# Altium PCB BDR110414.PcbDoc
Units mm, origin at the board's own origin, x right, y up, seen from the top; angles counter-clockwise.
Board outline 101.85 x 53.59 mm, 2 copper layers (Top Layer, Bottom Layer), stack 1.671 mm thick; 58 components, 107 nets, 243 pads, 54 vias.
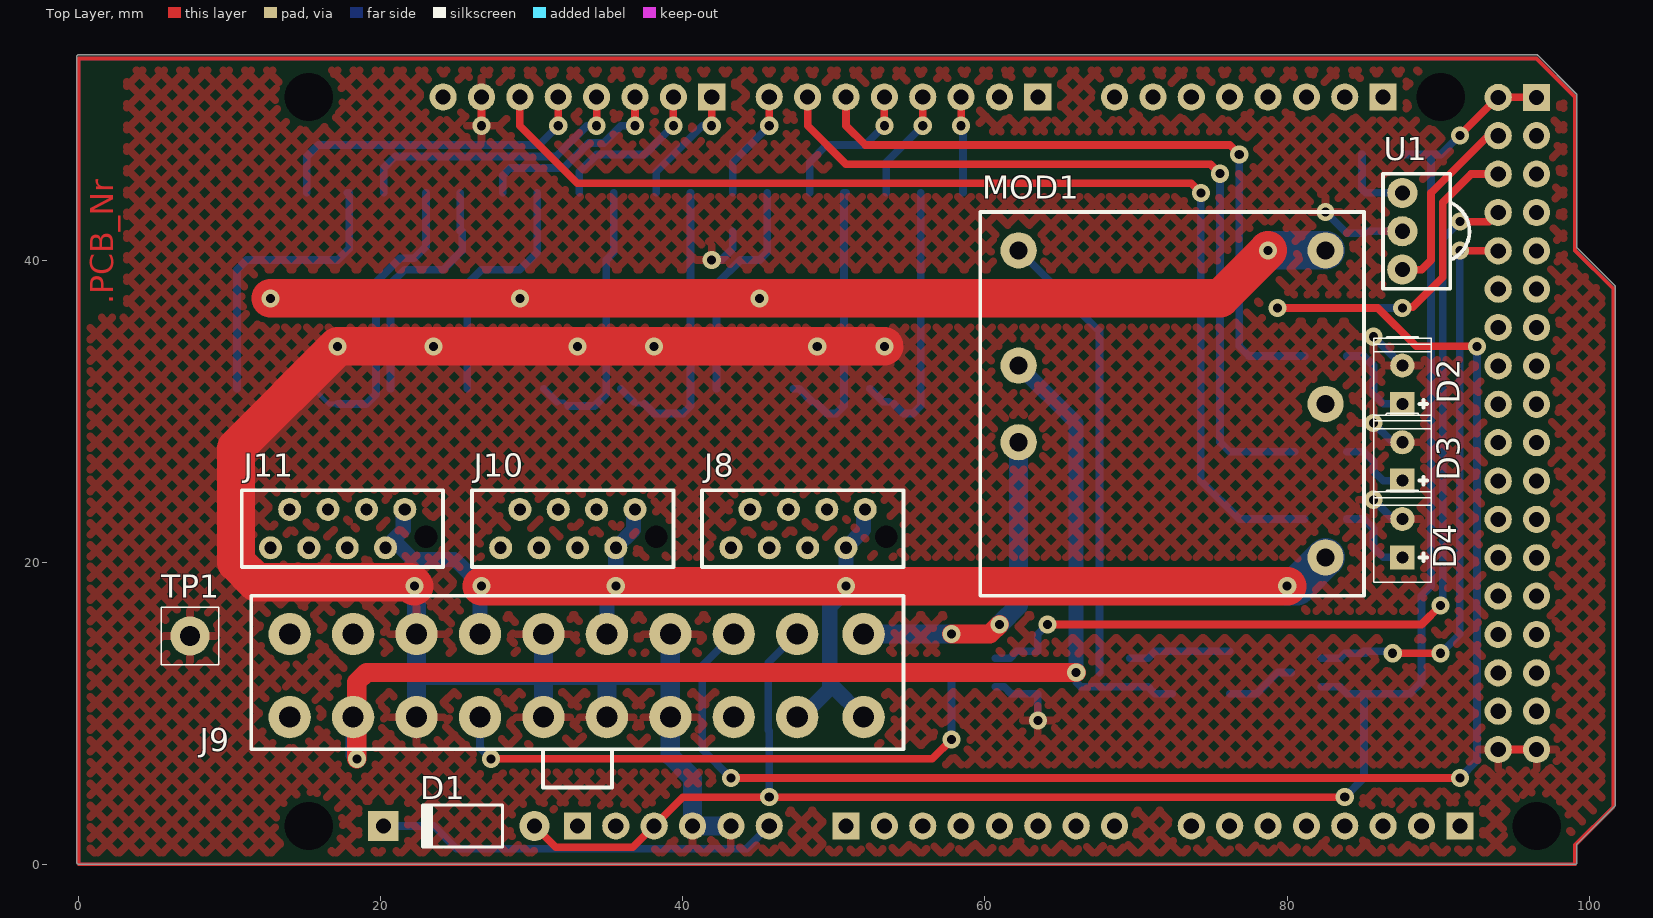
[diagram p0: Top Layer view]
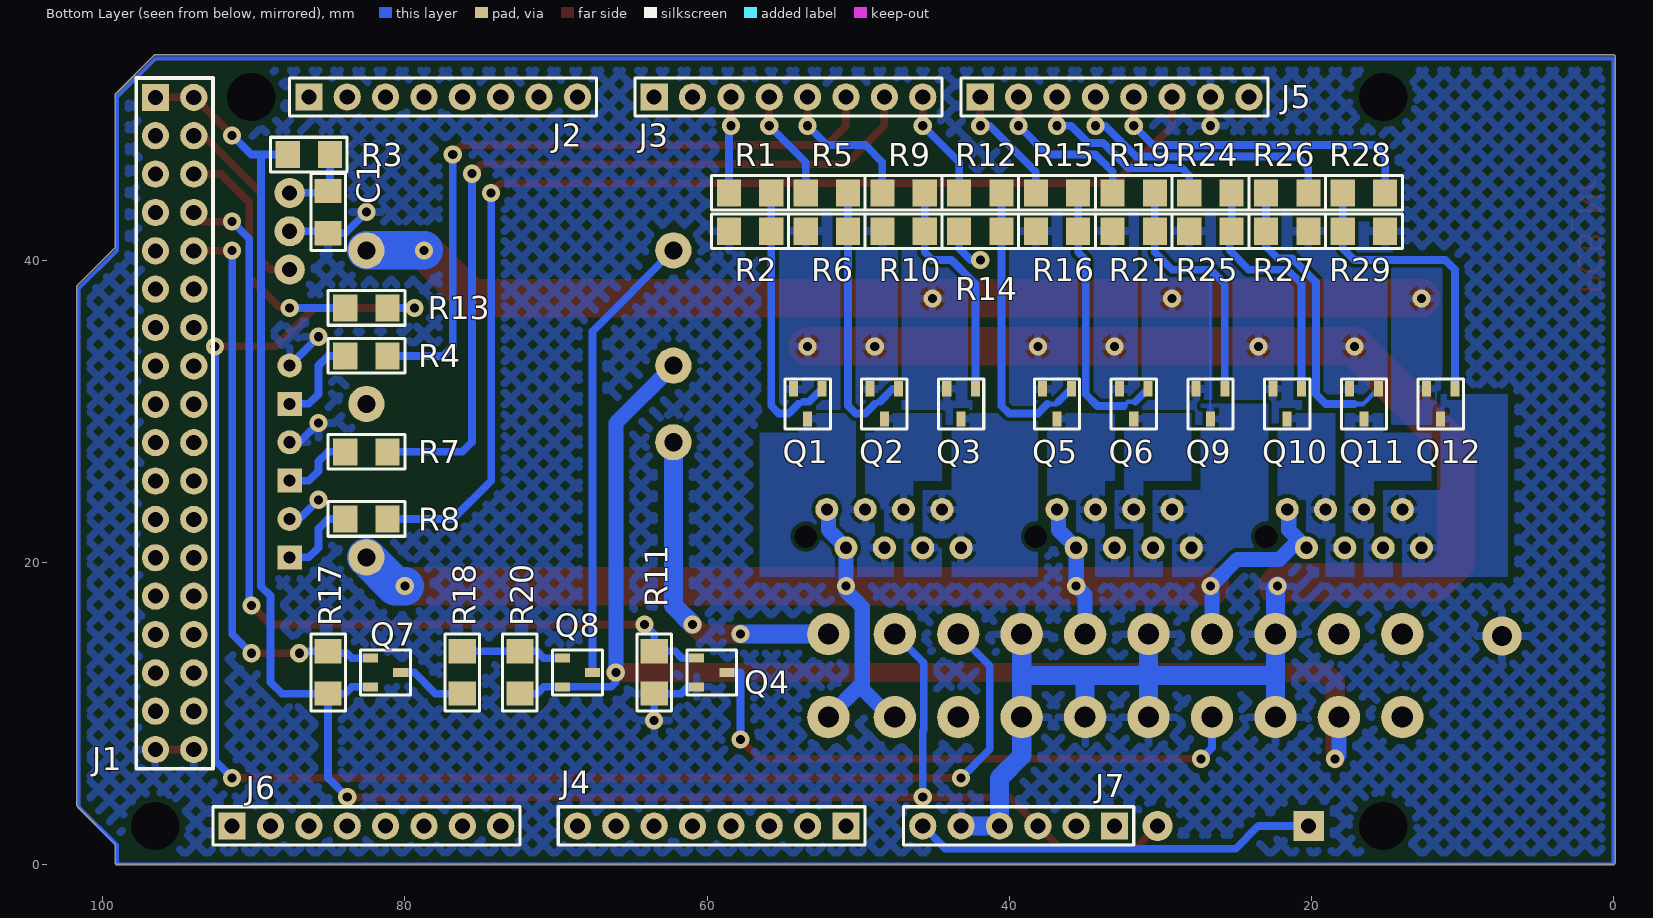
[diagram p1: Bottom Layer view, seen from below]
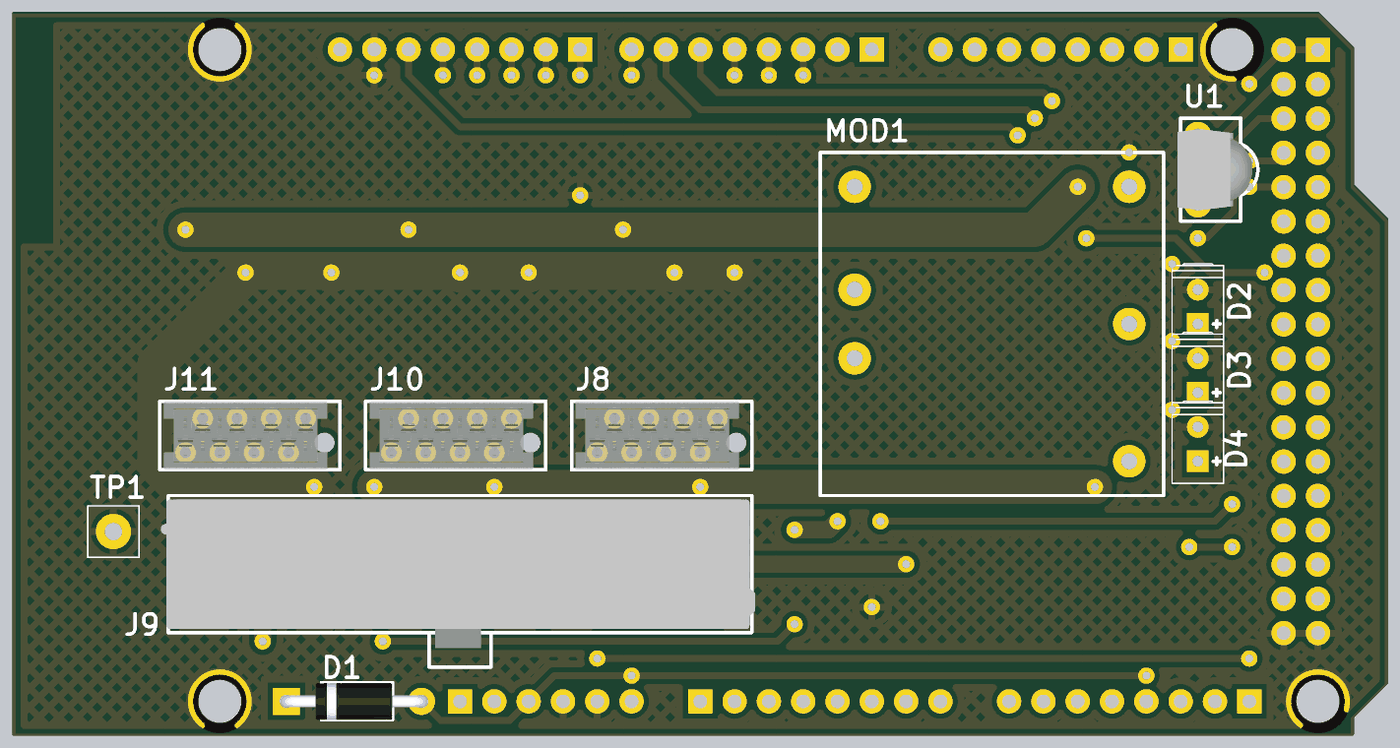
[diagram p2: 3D render of the assembled board from above, using the file's embedded part models]
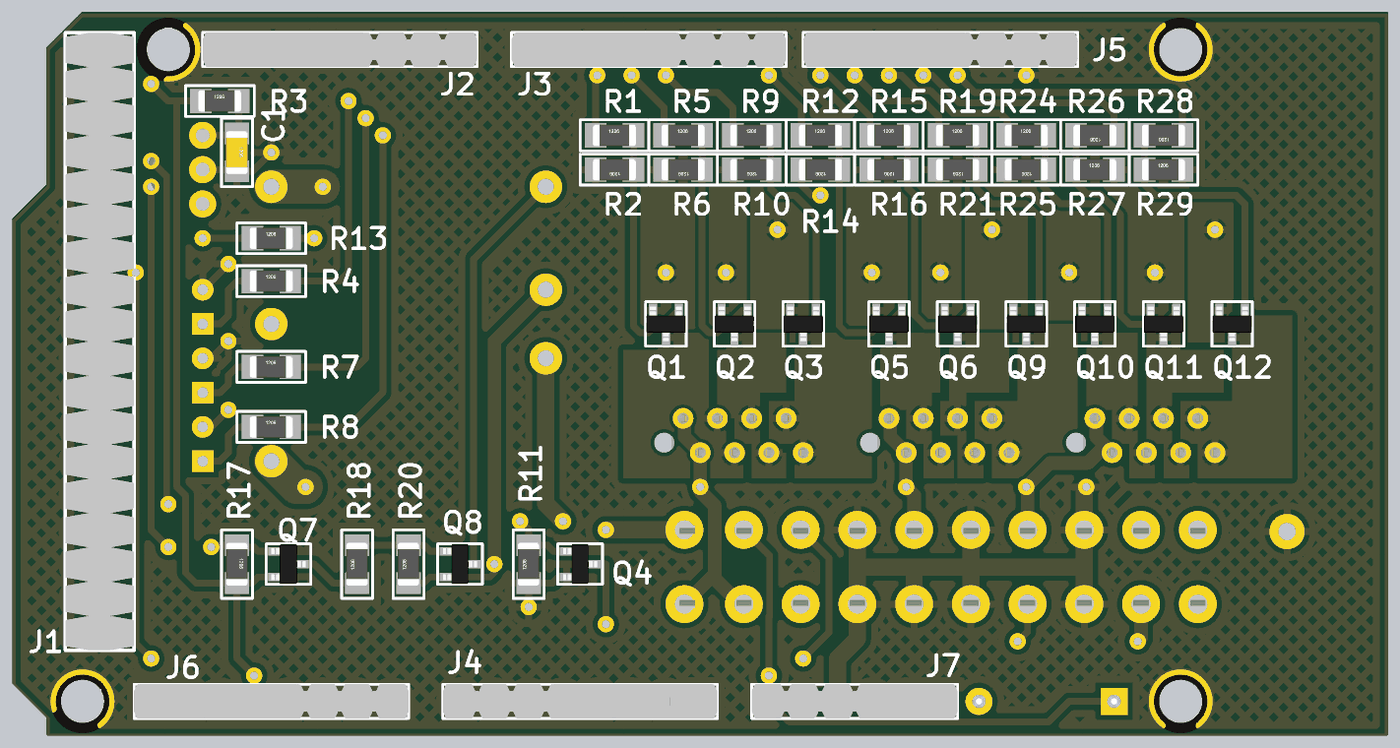
[diagram p3: 3D render of the assembled board from below, using the file's embedded part models]

## Layer stack, top to bottom
Top Layer: signal copper 0.0356
Dielectric: core 1.6, FR-4, Dk 4.8
Bottom Layer: signal copper 0.0356

## Board outline
0,0 99.06,0 ccw(c99.06,0.127) 99.187,0.127 99.187,1.345 101.69,3.847 ccw(c101.6,3.937) 101.727,3.937 101.727,38.227 ccw(c101.6,38.227) 101.69,38.318 101.69,38.317 99.187,40.82 99.187,50.927 cw(c99.124,50.927) 99.187,50.927 ccw(c99.06,50.927) 99.187,50.927 ccw(c99.06,50.927) 99.15,51.018 99.15,51.017 96.611,53.557 ccw(c96.565,53.512) 96.61,53.557 ccw(c96.52,53.467) 96.519,53.595 96.52,53.595 cw(c96.52,53.467) 96.611,53.557 96.61,53.557 96.52,53.595 0,53.595 ccw(c0,53.467) -0.127,53.467 -0.127,0.127 ccw(c0,0.127)

## Design rules (kind name [scope] priority, off if disabled: settings)
Clearance Clearance_Planes [(InNamedPolygon('TOP_GND') OR InNamedPolygon('BOT_GND'))] p1: gap=0.381
Clearance Clearance_General [All] p2: gap=0.254
HoleSize [All] p1: absolutevalues=TRUE maxlimit=3.2 minlimit=0.6 maxpercent=80.000 minpercent=20.000
MinimumAnnularRing [All] p1: minimumring=0.3
MinimumSolderMaskSliver [All] p1 off: minsoldermaskwidth=0.254
PlaneConnect [All] p1: planeconnectstyle=Relief reliefexpansion=0.508 reliefentries=4 reliefconductorwidth=0.508 reliefairgap=0.254
PolygonConnect [All] p1: connectstyle=Relief reliefconductorwidth=0.508 reliefentries=4 polygonreliefangle="90 Angle"
RoutingVias [All] p1: holewidth=0.6 width=1.27 viastyle="Through Hole" minholewidth=0.6 minwidth=1.27 maxholewidth=3.2 maxwidth=6.4
SilkToSilkClearance [All] p1 off: silktosilkclearance=0.254
SilkscreenOverComponentPads [All] p1 off: minsilkscreentomaskgap=0.254
SolderMaskExpansion [All] p1: expansion=0
Width [All] p1: maxlimit=5 minlimit=0.254 preferedwidth=0.508
23 further rules are at their usual default settings.

## Components (designator, comment, footprint, x,y, rotation, side; value= is the part's Value field where it differs from the comment)
C1 "YCAM4U7" C_1206 85.09,43.18 r270 bottom
D1 "DIO1N4007" DO-41 25.4,2.54 r180 top
D2 "OVL3328" D_LED3mm_straight 87.63,30.48 r270 top
D3 "OVL3324" D_LED3mm_straight 87.63,25.4 r270 top
D4 "OVL3323" D_LED3mm_straight 87.63,20.32 r270 top
J1 "CNHDR036M3-2_TBD" J_HDR2X18 96.52,50.775 r180 bottom locked
J2 "CNHDR036M3-1/8" J_HDR1X8 86.36,50.8 r180 bottom
J3 "CNHDR036M3-1/8" J_HDR1X8 63.5,50.8 r180 bottom
J4 "CNHDR036M3-1/8" J_HDR1X8 50.8,2.54 r0 bottom
J5 "CNHDR036M3-1/8" J_HDR1X8 41.91,50.8 r180 bottom
J6 "CNHDR036M3-1/8" J_HDR1X8 91.44,2.54 r180 bottom
J7 "CNHDR036M3-1/6" J_HDR1X6 33.02,2.54 r0 bottom locked
J8 "CNFLC08M_TBD" J_215079-8 52.07,23.495 r0 top
J9 "39-28-1203" J_MiniFit_Jr_20P 13.97,15.24 r0 top
J10 "CNFLC08M_TBD" J_215079-8 36.83,23.495 r0 top
J11 "CNFLC08M_TBD" J_215079-8 21.59,23.495 r0 top
MOD1 "YDCDC15W-3V3-SH" MOD_DCDC_15W_TH 62.23,27.94 r0 top
Q1 "ZXMN2F30FH" SOT23 53.34,30.48 r270 bottom
Q2 "ZXMN2F30FH" SOT23 48.26,30.48 r270 bottom
Q3 "ZXMN2F30FH" SOT23 43.18,30.48 r270 bottom
Q4 "2N7002" SOT23 59.69,12.7 r180 bottom
Q5 "ZXMN2F30FH" SOT23 36.83,30.48 r270 bottom
Q6 "ZXMN2F30FH" SOT23 31.75,30.48 r270 bottom
Q7 "BSS84" SOT23 81.28,12.7 r180 bottom
Q8 "2N7002" SOT23 68.58,12.7 r180 bottom
Q9 "ZXMN2F30FH" SOT23 26.67,30.48 r270 bottom
Q10 "ZXMN2F30FH" SOT23 21.59,30.48 r270 bottom
Q11 "ZXMN2F30FH" SOT23 16.51,30.48 r270 bottom
Q12 "ZXMN2F30FH" SOT23 11.43,30.48 r270 bottom
R1 "YRES120E_TBD" R_1206 57.15,44.45 r180 bottom
R2 "YRES10K" R_1206 57.15,41.91 r0 bottom
R3 "YRES120E_TBD" R_1206 86.36,46.99 r180 bottom
R4 "YRES270E_TBD" R_1206 82.55,33.655 r180 bottom
R5 "YRES120E_TBD" R_1206 52.07,44.45 r180 bottom
R6 "YRES10K" R_1206 52.07,41.91 r0 bottom
R7 "YRES270E_TBD" R_1206 82.55,27.305 r180 bottom
R8 "YRES270E_TBD" R_1206 82.55,22.86 r180 bottom
R9 "YRES120E_TBD" R_1206 46.99,44.45 r180 bottom
R10 "YRES10K" R_1206 46.99,41.91 r0 bottom
R11 "YRES10K" R_1206 63.5,12.7 r90 bottom
R12 "YRES120E_TBD" R_1206 41.91,44.45 r180 bottom
R13 "YRES270E_TBD" R_1206 82.55,36.83 r180 bottom
R14 "YRES10K" R_1206 41.91,41.91 r0 bottom
R15 "YRES120E_TBD" R_1206 36.83,44.45 r180 bottom
R16 "YRES10K" R_1206 36.83,41.91 r0 bottom
R17 "YRES10K" R_1206 85.09,12.7 r270 bottom
R18 "YRES10K" R_1206 76.2,12.7 r90 bottom
R19 "YRES120E_TBD" R_1206 31.75,44.45 r180 bottom
R20 "YRES10K" R_1206 72.39,12.7 r90 bottom
R21 "YRES10K" R_1206 31.75,41.91 r0 bottom
R24 "YRES120E_TBD" R_1206 26.67,44.45 r180 bottom
R25 "YRES10K" R_1206 26.67,41.91 r0 bottom
R26 "YRES120E_TBD" R_1206 21.59,44.45 r0 bottom
R27 "YRES10K" R_1206 21.59,41.91 r180 bottom
R28 "YRES120E_TBD" R_1206 16.51,44.45 r0 bottom
R29 "YRES10K" R_1206 16.51,41.91 r180 bottom
TP1 "CN001M1" TP_TH_1.3mm 7.366,15.113 r0 top
U1 "TSOP34838" TSOP34XXX 87.63,39.37 r90 top

## Footprints (in the part's own frame and the unit in brackets; to place one, negate y for a bottom-side part, rotate by r counter-clockwise, add the part's x,y. Pads: shape width x height; smd on the part's side, far side on the other; paste and mask are expansions set on the pad)
C_1206 [mm] "Chip Capacitor; Body 3.2 x 1.6 mm (LxW typ)"
  rect 1.6x1.8 smd: 1(-1.4,0) 2(1.4,0)
  silkscreen extent -2.54,-1.14 2.54,1.14, body extent -1.6,-0.8 1.6,0.8, height 1
D_LED3mm_straight [mm]
  rect 1.6x1.6 hole 0.8: 1(0,0)
  round 1.6 hole 0.8: 2(-2.54,0)
  silkscreen extent -4.46,-1.91 1.64,1.91
DO-41 [mm] "Diode, Axial; Body 5.2 x 2.7 mm (LxDia. max), Lead Dia. 0.86 mm (max)"
  round 2 hole 1: 1(-4.77,0)
  rect 2x2 hole 1: 2(5.23,0)
  silkscreen extent -2.65,-1.4 2.75,1.4, body extent -5.2,-1.36 5.66,1.36, height 2.72
J_215079-8 [mil] "MicroMatch 8p through hole vertical"
  round 0 hole 59.06 unplated mask+29.53: 0(55.12,-70.87)
  round 60 hole 31.5: 1(0,0) 2(-50,-100) 3(-100,0) 4(-150,-100) 5(-200,0) 6(-250,-100) 7(-300,0) 8(-350,-100)
  silkscreen extent -425,-150 100,50, body extent -413,-148 63,48, height 157
J_HDR1X6 [mm] "Connector; Header; 6 Position"
  rect 1.8x1.8 hole 1: 1(0,0)
  round 1.8 hole 1: 2(2.54,0) 3(5.08,0) 4(7.62,0) 5(10.16,0) 6(12.7,0)
  silkscreen extent -1.27,-1.27 13.97,1.27, body extent -1.27,-1.27 13.97,1.27, height 9.26
J_HDR1X8 [mm] "Connector; Header; 8 Position"
  rect 1.8x1.8 hole 1: 1(0,0)
  round 1.8 hole 1: 2(2.54,0) 3(5.08,0) 4(7.62,0) 5(10.16,0) 6(12.7,0) 7(15.24,0) 8(17.78,0)
  silkscreen extent -1.27,-1.27 19.05,1.27, body extent -1.27,-1.27 19.05,1.27, height 9.26
J_HDR2X18 [mm] "Header, 2X18, unshrouded, Molex 90131-0938"
  rect 1.8x1.8 hole 1: 1(0,0)
  round 1.8 hole 1: 2(2.54,0) 3(0,-2.54) 4(2.54,-2.54) 5(0,-5.08) 6(2.54,-5.08) 7(0,-7.62) 8(2.54,-7.62) 9(0,-10.16) 10(2.54,-10.16) 11(0,-12.7) 12(2.54,-12.7) 13(0,-15.24) 14(2.54,-15.24) 15(0,-17.78) 16(2.54,-17.78) 17(0,-20.32) 18(2.54,-20.32) 19(0,-22.86) 20(2.54,-22.86) 21(0,-25.4) 22(2.54,-25.4) 23(0,-27.94) 24(2.54,-27.94) 25(0,-30.48) 26(2.54,-30.48) 27(0,-33.02) 28(2.54,-33.02) 29(0,-35.56) 30(2.54,-35.56) 31(0,-38.1) 32(2.54,-38.1) 33(0,-40.64) 34(2.54,-40.64) 35(0,-43.18) 36(2.54,-43.18)
  silkscreen extent -1.27,-44.45 3.81,1.27, body extent -1.27,-44.45 3.81,1.27, height 9.25
J_MiniFit_Jr_20P [mm] "MOLEX - 39281203 - HEADER ASSEMBLY, MINIFIT, 20WAY"
  round 2.8 hole 1.4: 1(0,0) 2(0,-5.5) 3(4.2,0) 4(4.2,-5.5) 5(8.4,0) 6(8.4,-5.5) 7(12.6,0) 8(12.6,-5.5) 9(16.8,0) 10(16.8,-5.5) 11(21,0) 12(21,-5.5) 13(25.2,0) 14(25.2,-5.5) 15(29.4,0) 16(29.4,-5.5) 17(33.6,0) 18(33.6,-5.5) 19(38,0) 20(38,-5.5)
  silkscreen extent -2.54,-10.16 40.64,2.54, body extent -3.1,-8.75 40.9,2.25, height 12.8
MOD_DCDC_15W_TH [mm] "15W DC/DC converter, through hole, Power Mate"
  round 2.4 hole 1.2: 1(0,0) 2(0,5.08) 3(0,12.7) 4(20.32,-7.62) 5(20.32,2.54) 6(20.32,12.7)
  silkscreen extent -2.54,-10.16 22.86,15.24, body extent -2.67,-10.29 22.99,15.37, height 9.91
R_1206 [mm] "Chip Resistor; Body 3.2 x 1.6 mm (LxW typ)"
  rect 1.6x1.8 smd: 1(-1.4,0) 2(1.4,0)
  silkscreen extent -2.54,-1.14 2.54,1.14, body extent -1.6,-0.8 1.6,0.8, height 1
SOT23 [mm] "SOT23, 3-Leads, Body 2.9x1.3mm, Pitch 0.95mm, Lead Span 2.3mm, IPC High Density"
  rect 1x0.6 smd: 1(-1,0.95) 2(-1,-0.95) 3(1,0)
  silkscreen extent -1.65,-1.5 1.65,1.5, body extent -1.27,-1.46 1.27,1.46, height 0.99
TP_TH_1.3mm [mm]
  round 2.6 hole 1.3: 1(0,0)
  silkscreen extent -1.91,-1.91 1.91,1.91, body extent -2.98,-2.99 3,2.99, height 1
TSOP34XXX [mm] "Vishay, IR Remote receiver"
  round 2 hole 1: 1(0,0) 2(2.54,0) 3(5.08,0)
  silkscreen extent -1.27,-4.44 6.35,1.27, body extent -0.46,-4.05 5.54,1.5, height 10.25

## Part data
D1: "1 Amp General Purpose Rectifier"
J2 J3 J4 J5 J6 J7: "*"
J8 J10 J11: library part CNFLC08F_TBD, "*"
R1 R2 R3 R4 R5 R6 R7 R8 R9 R10 R11 R12 R13 R14 R15 R16 R17 R18 R19 R20 R21 R24 R25 R26 R27 R28 R29: "Resistor"

## Free pads (board coordinates)
  round 1.524 hole 3.2 unplated mask+1.6: 0(15.24,2.54) 0(15.24,50.8) 0(90.17,50.8) 0(96.52,2.54)

## Via types
v1: diameter 1.2, hole 0.6, Top Layer to Bottom Layer, 54 vias

## Nets (pads, with @x,y where several pads share a name; then routed paths per layer and width w, separated by ;. In a path a pad name is that pad's centre, name@x,y a point inside that pad or via, vN(x,y) a via of type N, cw(c..) or ccw(c..) an arc to the next point about the centre after c; other vN are vias at no path point)
1.7V: MOD1.6 Q3.2 Q9.2 Q12.2 | length 71.2
  Top Layer w2.54: v1(12.7,37.465) v1(29.21,37.465) v1(45.085,37.465) 75.565,37.465 v1(78.74,40.64)
  Bottom Layer w2.54: v1(78.74,40.64) MOD1.6
3V3: J7.2
5V: D1.1 J1.1 J1.2 J7.3 J9.17 Q7.2 R3.1 R17.2 | length 127.2
  Top Layer w0.508: D1.1 31.578,1.132 36.692,1.132 J7.3 40.005,4.445 v1(45.72,4.445) v1(83.82,4.445) ; v1(91.44,48.26) 93.955,50.775 J1.2 J1.1
  Bottom Layer w0.508: v1(45.72,4.445) 45.72,8.834 45.662,8.892 45.662,13.332 J9.17 ; Q7.2 83.5,11.75 83.95,11.3 R17.2 ; v1(83.82,4.445) 85.09,5.715 R17.2 ; R3.1 89.535,46.99 ; v1(91.44,48.26) 90.17,46.99 89.535,46.99 ; R17.2 88.135,11.3 88.9,12.065 88.9,17.78 89.535,18.415 89.535,46.99
+5V: J8.1 J8.2 J9.7 J9.11 J9.18 J9.20 J10.1 J10.2 J11.1 J11.2 MOD1.4 | length 97.9
  Top Layer w2.54: v1(26.67,18.415) v1(35.56,18.415) v1(50.8,18.415) v1(80.01,18.415)
  Bottom Layer w1: J11.2 J11.2@20.828,21.463 ; J11.1 21.486,23.391 21.486,22.121 J11.2@20.828,21.463 ; J9.7 26.57,18.315 v1(26.67,18.415) 24.894,20.191 22.1,20.191 J11.2@20.828,21.463 ; J9.11 34.97,17.825 v1(35.56,18.415) J10.2 36.726,22.121 36.726,23.391 J10.1 ; J9.18 47.84,9.74 49.724,11.624 49.724,17.024 50.8,18.1 v1(50.8,18.415) J8.2 51.966,22.121 51.966,23.391 J8.1 ; 49.816,11.894 J9.20
  Bottom Layer w2.54: v1(80.01,18.415) 80.645,18.415 MOD1.4
+12V: J9.19 MOD1.1 | length 21.8
  Top Layer w1.27: v1(57.785,15.24) 60.325,15.24 v1(60.96,15.875)
  Bottom Layer w1.27: J9.19 v1(57.785,15.24) ; v1(60.96,15.875) 62.23,17.145 MOD1.1
-12V: J9.4 MOD1.2 Q8.2 R20.1 | length 85
  Top Layer w1.27: v1(18.415,6.985) 18.415,12.065 19.05,12.7 v1(66.04,12.7)
  Bottom Layer w0.508: v1(66.04,12.7) 66.04,12.065 66.355,11.75 Q8.2 70.8,11.75 71.12,11.43 71.25,11.3 R20.1
  Bottom Layer w1: J9.4 18.17,7.23 v1(18.415,6.985) ; MOD1.2 66.04,29.21 v1(66.04,12.7)
/PS_ON_1: J9.8 Q4.3 | length 39.6
  Top Layer w0.508: v1(27.305,6.985) 56.515,6.985 v1(57.785,8.255)
  Bottom Layer w0.508: J9.8@26.67,9.64 J9.8 26.57,7.72 v1(27.305,6.985) ; v1(57.785,8.255) 57.785,12.7 Q4.3
AIN0: J4.1
AIN1: J4.2
AIN2: J4.3
AIN3: J4.4
AIN4: J4.5
AIN5: J4.6
AIN6: J4.7
AIN7: J4.8
AIN8: J6.1
AIN9: J6.2
AIN10: J6.3
AIN11: J6.4
AIN12: J6.5
AIN13: J6.6
AIN14: J6.7
AIN15: J6.8
AREF: J5.8
BLUE1_1: J8.3 J8.4 Q1.3
BLUE2_1: J10.3 J10.4 Q5.3
BLUE3_1: J11.3 J11.4 Q10.3
D22: J1.4 U1.1 | length 12.6
  Top Layer w0.508: U1.1 88.9,39.37 89.535,40.005 89.535,44.45 93.32,48.235 J1.4
D23: J1.3
D24: J1.6 R13.1 | length 16.6
  Top Layer w0.508: v1@87.63,36.868 88.303,36.868 90.297,38.862 90.297,43.815 92.177,45.695 J1.6
  Bottom Layer w0.508: R13.1 v1(87.63,36.83)
D25: J1.5
D26: J1.8 Q4.1 R11.2 | length 60.3
  Top Layer w0.508: v1(64.135,15.875) 88.9,15.875 v1(90.17,17.145) ; v1(91.44,42.545) 93.37,42.545 J1.8
  Bottom Layer w0.508: Q4.1 61.656,13.65 62.106,14.1 R11.2 63.5,15.24 v1(64.135,15.875) ; v1(90.17,17.145) 90.297,17.272 90.297,41.402 v1(91.44,42.545)
D27: J1.7
D28: J1.10 Q7.1 R17.1 | length 38.1
  Top Layer w0.508: v1(86.995,13.97) v1(90.17,13.97) ; v1(91.44,40.64) 91.465,40.615 J1.10
  Bottom Layer w0.508: Q7.1 83.5,13.65 83.82,13.97 85.09,13.97 R17.1 ; R17.1@85.22,13.97 R17.1 ; v1(86.995,13.97) 86.865,14.1 R17.1 ; v1(90.17,13.97) 91.44,15.24 91.44,16.164 v1(91.44,40.64)
D29: J1.9
D30: J1.12
D31: J1.11
D32: J1.14
D33: J1.13
D34: J1.16
D35: J1.15
D36: J1.18
D37: J1.17
D38: J1.20
D39: J1.19
D40: J1.22
D41: J1.21
D42: J1.24
D43: J1.23
D44: J1.26
D45: J1.25
D46: J1.28
D47: J1.27
D48: J1.30
D49: J1.29
D50: J1.32
D51: J1.31
D52: J1.34
D53: J1.33
GND: C1.2 D2.2 D3.2 D4.2 J1.35 J1.36 J5.7 J7.4 J7.5 J9.5 J9.6 J9.9 J9.10 J9.12 J9.13 J9.14 Q1.2 Q2.2 Q4.2 Q5.2 Q6.2 Q10.2 Q11.2 R2.2 R6.2 R10.2 R11.1 R14.2 R16.2 R21.2 R25.2 R27.2 R29.2 TP1.1 U1.2 | length 140.8
  Top Layer w0.508: v1(26.67,48.895) J5.7 ; J1.36 J1.35
  Top Layer w2.54: v1(22.225,18.415) 21.971,18.669 11.753,18.669 10.414,20.008 10.414,27.559 v1(17.145,34.29) v1(23.495,34.29) v1(33.02,34.29) v1(38.1,34.29) v1(48.895,34.29) v1(53.34,34.29)
  Bottom Layer w0.508: v1(41.91,40.005) 42.545,40.005 43.31,40.77 R14.2 ; Q4.2 61.275,11.75 61.725,11.3 R11.1 v1(63.5,9.525) ; v1(82.55,43.18) 83.95,41.78 C1.2 85.22,41.91 U1.2 ; v1(85.725,24.13) 86.995,22.86 D4.2 ; v1(85.725,29.21) 86.995,27.94 D3.2 ; v1(85.725,34.925) D2.2
  Bottom Layer w1.27: v1(22.225,18.415) 22.37,18.27 J9.5 22.37,12.49 ; J9.6 22.37,12.49 ; J9.10 30.77,12.49 ; J9.9 30.77,12.49 ; J9.12 34.97,12.445 34.925,12.49 ; J9.13 39.17,12.7 ; J7.5 J7.4 40.64,5.715 39.17,7.185 J9.14 39.17,12.7 ; 22.37,12.49 30.77,12.49 ; 30.77,12.49 34.925,12.49 ; 34.925,12.49 38.96,12.49 39.17,12.7
GREEN1_1: J8.5 J8.6 Q2.3
GREEN2_1: J10.5 J10.6 Q6.3
GREEN3_1: J11.5 J11.6 Q11.3
NetC1_1: C1.1 R3.2 U1.3 | length 5.1
  Bottom Layer w0.508: R3.2 84.96,44.71 C1.1 85.22,44.45 U1.3
NetD2_1: D2.1 R4.1 | length 6.1
  Bottom Layer w0.508: R4.1 85.09,33.655 85.725,33.02 85.725,31.115 86.36,30.48 D2.1
NetD3_1: D3.1 R7.1 | length 4.8
  Bottom Layer w0.508: R7.1 85.09,27.305 85.725,26.67 85.725,26.035 86.36,25.4 D3.1
NetD4_1: D4.1 R8.1 | length 5.5
  Bottom Layer w0.508: R8.1 85.09,22.86 85.725,22.225 85.725,20.955 86.36,20.32 D4.1
NetMOD1_3: MOD1.3 Q8.3 | length 30.2
  Bottom Layer w0.508: MOD1.3 67.58,35.29 Q8.3
NetQ1_1: Q1.1 R1.2 R2.1 | length 18.3
  Bottom Layer w0.305: 53.631,30.621 53.774,30.621 53.822,30.574 53.873,30.574 53.975,30.472
  Bottom Layer w0.508: Q1.1 53.249,30.621 53.631,30.621 ; 53.975,30.472 54.602,29.845 55.245,29.845 55.75,30.35 R2.1 R1.2
NetQ2_1: Q2.1 R5.2 R6.1 | length 18.5
  Bottom Layer w0.305: 48.551,30.621 48.598,30.574 48.793,30.574 48.895,30.472
  Bottom Layer w0.508: Q2.1 47.692,31.48 48.551,30.621 ; 48.895,30.472 49.522,29.845 50.165,29.845 50.67,30.35 R6.1 50.67,44.32 50.8,44.45 R5.2
NetQ3_1: Q3.1 R9.2 R10.1 | length 15.1
  Bottom Layer w0.508: Q3.1 42.23,38.42 43.815,40.005 45.085,40.005 45.59,40.51 R10.1 R9.2
NetQ5_1: Q5.1 R12.2 R14.1 | length 19.6
  Bottom Layer w0.305: 36.739,30.621 36.888,30.472 37.465,30.472
  Bottom Layer w0.508: Q5.1 36.739,30.621 ; 37.465,30.472 38.092,29.845 40.005,29.845 40.51,30.35 R14.1 R12.2
NetQ6_1: Q6.1 R15.2 R16.1 | length 18.5
  Bottom Layer w0.305: 31.659,30.621 32.128,30.621 32.409,30.339
  Bottom Layer w0.508: Q6.1 31.659,30.621 ; 32.409,30.339 34.149,30.339 34.925,31.115 34.925,40.005 35.43,40.51 R16.1 R15.2
NetQ7_3: Q7.3 R18.1 | length 4.7
  Bottom Layer w0.508: R18.1 77.975,11.3 79.375,12.7 Q7.3
NetQ8_1: Q8.1 R18.2 R20.2 | length 6.8
  Bottom Layer w0.508: Q8.1 70.8,13.65 71.25,14.1 R20.2 R18.2
NetQ9_1: Q9.1 R19.2 R21.1 | length 16.4
  Bottom Layer w0.508: Q9.1 25.72,38.42 26.67,39.37 29.21,39.37 30.35,40.51 R21.1 R19.2
NetQ10_1: Q10.1 R24.2 R25.1 | length 16.6
  Bottom Layer w0.508: Q10.1 20.64,37.142 20.64,38.42 21.59,39.37 24.13,39.37 25.4,40.64 R25.1@25.4,41.91 ; R25.1 R25.1@25.4,41.91 ; R24.2 25.27,42.04 R25.1@25.4,41.91
NetQ11_1: Q11.1 R26.2 R27.1 | length 20.1
  Bottom Layer w0.305: Q11.1 16.568,30.472 17.145,30.472
  Bottom Layer w0.508: 17.145,30.472 19.042,30.472 19.685,31.115 19.685,38.543 21.274,40.132 22.225,40.132 22.99,40.897 R27.1 R26.2
NetQ12_1: Q12.1 R28.2 R29.1 | length 19.8
  Bottom Layer w0.508: Q12.1 10.48,39.37 11.115,40.005 17.145,40.005 17.91,40.77 R29.1 17.91,44.32 17.78,44.45 R28.2
PWM2: J3.3 R1.1 | length 6.4
  Top Layer w0.508: v1(58.42,48.895) J3.3
  Bottom Layer w0.508: v1(58.42,48.895) 58.55,48.765 R1.1
PWM3: J3.4 R5.1 | length 7.3
  Top Layer w0.508: v1(55.88,48.895) J3.4
  Bottom Layer w0.508: R5.1 53.47,46.485 v1(55.88,48.895)
PWM4: J3.5 R9.1 | length 9.9
  Top Layer w0.508: v1(53.34,48.895) J3.5
  Bottom Layer w0.508: R9.1 48.39,46.485 49.53,47.625 52.07,47.625 v1(53.34,48.895)
PWM5: J3.6 R4.2 | length 46
  Top Layer w0.508: J3.6 50.8,48.895 52.07,47.625 76.2,47.625 v1(76.835,46.99)
  Bottom Layer w0.508: v1(76.835,46.99) 76.835,34.29 77.47,33.655 R4.2
PWM6: J3.7 R7.2 | length 53.5
  Top Layer w0.508: J3.7 48.26,48.895 50.8,46.355 74.93,46.355 v1(75.565,45.72)
  Bottom Layer w0.508: v1(75.565,45.72) 75.565,27.94 76.2,27.305 R7.2@80.515,27.305
PWM7: J3.8 R12.1 | length 7.3
  Top Layer w0.508: v1(45.72,48.895) J3.8
  Bottom Layer w0.508: R12.1 43.31,46.485 v1(45.72,48.895)
PWM8: J5.1 R15.1 | length 8.2
  Top Layer w0.508: v1(41.91,48.895) J5.1
  Bottom Layer w0.508: R15.1 38.23,45.85 41.275,48.895 v1(41.91,48.895)
PWM9: J5.2 R19.1 | length 10.8
  Top Layer w0.508: v1(39.37,48.895) J5.2
  Bottom Layer w0.508: R19.1 33.15,45.85 34.29,46.99 37.465,46.99 v1(39.37,48.895)
PWM10: J5.3 R24.1 | length 13.2
  Top Layer w0.508: v1(36.83,48.895) J5.3
  Bottom Layer w0.508: R24.1 28.07,45.596 28.575,46.101 32.131,46.101 33.782,47.752 34.763,47.752 35.906,48.895 v1(36.83,48.895)
PWM11: J5.4 R26.1 | length 18.8
  Top Layer w0.508: v1(34.29,48.895) J5.4
  Bottom Layer w0.508: R26.1 20.19,46.098 20.955,46.863 31.623,46.863 33.655,48.895 v1(34.29,48.895)
PWM12: J5.5 R28.1 | length 21.8
  Top Layer w0.508: v1(31.75,48.895) J5.5
  Bottom Layer w0.508: R28.1 15.11,46.86 15.875,47.625 30.48,47.625 v1(31.75,48.895)
PWM13: J5.6 R8.2 | length 75.8
  Top Layer w0.508: J5.6 29.21,48.895 33.02,45.085 73.66,45.085 v1(74.295,44.45)
  Bottom Layer w0.508: v1(74.295,44.45) 74.295,25.4 76.835,22.86 R8.2
PWR_GOOD_1: J9.15 R13.2 | length 104.5
  Top Layer w0.508: v1(43.18,5.715) v1(91.44,5.715) ; v1(79.375,36.83) 86.014,36.83 88.554,34.29 v1(92.583,34.29)
  Bottom Layer w0.508: v1(43.18,5.715) 41.275,7.62 41.275,13.145 J9.15 ; v1(79.375,36.83) R13.2 ; v1(91.44,5.715) 92.572,6.847 92.572,34.279 v1(92.583,34.29)
RED1_1: J8.7 J8.8 Q3.3
RED2_1: J10.7 J10.8 Q9.3
RED3_1: J11.7 J11.8 Q12.3
RESET: J7.1
RX: J3.1
RX1: J2.3
RX2: J2.5
RX3: J2.7
SCL: J2.1
SDA: J2.2
TX: J3.2
TX1: J2.4
TX2: J2.6
TX3: J2.8
VIN: D1.2 J7.6 | length 26.8
  Bottom Layer w0.508: D1.2 23.495,2.54 25.003,1.032 44.212,1.032 J7.6
pads on no net: J8.0 J9.1 J9.2 J9.3 J9.16 J10.0 J11.0 MOD1.5
copper on no net: | length 610.8
  Top Layer w0.254: 0,0 0,53.34 96.52,53.34 99.06,50.8 99.06,40.64 101.6,38.1 101.6,3.81 99.06,1.27 99.06,0 0,0
  Bottom Layer w0.254: 0,0 99.06,0 99.06,1.27 101.6,3.81 101.6,38.1 99.06,40.64 99.06,50.8 96.52,53.34 0,53.34 0,0

## Polygon pours and split planes (outlines as drawn)
1.7V on Bottom Layer "LED1_R" (solid, remove dead copper, pour order 60): 47.1,40.843 47.1,29.21 47.068,29.132 46.99,29.1 42.545,29.1 42.467,29.132 42.435,29.21 42.435,40.843
BLUE1_1 on Bottom Layer "Bottom Layer-BLUE1_1" (solid, remove dead copper, pour order 54): 53.975,29.845 53.975,28.575 56.515,28.575 56.515,19.05 47.625,19.05 47.625,20.955 48.895,20.955 48.895,24.13 50.165,24.13 50.165,29.845
GREEN1_1 on Bottom Layer "Bottom Layer-GREEN1_1" (solid, remove dead copper, pour order 53): 48.916,29.845 48.895,29.824 48.895,28.575 49.53,28.575 49.53,23.495 48.26,23.495 48.26,21.59 46.99,21.59 46.99,19.05 44.45,19.05 44.45,20.955 46.355,20.955 46.355,25.4 44.45,25.4 44.45,29.845
BLUE2_1 on Bottom Layer "Bottom Layer-No Net" (solid, remove dead copper, pour order 66): 37.465,29.845 37.465,24.13 35.56,24.13 35.56,21.59 34.29,21.59 34.29,19.05 31.75,19.05 31.75,21.59 33.655,21.59 33.655,25.4 33.02,25.4 33.02,29.845
GREEN2_1 on Bottom Layer "Bottom Layer-GREEN2_1" (solid, remove dead copper, pour order 51): 32.385,29.845 32.385,24.765 33.02,24.765 33.02,22.225 31.75,22.225 31.75,19.05 29.845,19.05 29.845,20.955 31.115,20.955 31.115,25.4 27.94,25.4 27.94,29.845
RED2_1 on Bottom Layer "Bottom Layer-RED2_1" (solid, remove dead copper, pour order 50): 22.86,30.48 22.86,19.05 29.21,19.05 29.21,21.59 30.48,21.59 30.48,24.765 27.305,24.765 27.305,30.48
1.7V on Bottom Layer "LED3_R" (solid, remove dead copper, pour order 56): 14.683,39.448 14.715,39.37 14.715,29.21 14.683,29.132 14.605,29.1 12.065,29.1 11.987,29.132 11.43,29.083 11.43,32.275 11.352,32.307 11.32,32.385 11.32,39.37 11.352,39.448 11.43,39.48 14.605,39.48
RED3_1 on Bottom Layer "Bottom Layer-RED3_1" (solid, remove dead copper, pour order 49): 6.985,31.115 6.985,19.05 13.97,19.05 13.97,21.59 15.24,21.59 15.24,24.765 11.43,24.765 11.43,31.115
GREEN3_1 on Bottom Layer "Bottom Layer-No Net" (solid, remove dead copper, pour order 65): 15.24,29.845 17.78,29.845 17.78,21.59 16.51,21.59 16.51,19.05 14.605,19.05 14.605,20.955 15.875,20.955 15.875,25.4 12.065,25.4 12.065,28.575 15.24,28.575
BLUE3_1 on Bottom Layer "Bottom Layer-BLUE3_1" (solid, remove dead copper, pour order 48): 22.225,29.845 22.225,24.13 20.32,24.13 20.32,21.59 19.05,21.59 19.05,19.05 17.145,19.05 17.145,20.955 18.415,20.955 18.415,29.845
GND on Bottom Layer "BOT_GND" (hatched 45Degree grid 1.016 track 0.508, remove dead copper, pour order 67): 0,0 0,53.34 96.52,53.34 99.06,50.8 99.06,40.64 101.6,38.1 101.6,3.81 99.06,1.27 99.06,0
1.7V on Bottom Layer "LED2_R" (solid, remove dead copper, pour order 57): 31.193,40.718 31.225,40.64 31.225,29.21 31.193,29.132 31.115,29.1 26.67,29.1 26.592,29.132 26.56,29.21 26.56,40.64 26.592,40.718 26.67,40.75 31.115,40.75
GND on Bottom Layer "LED3_B" (solid, remove dead copper, pour order 55): 20.64,43.18 20.64,29.21 26.035,29.21 26.035,39.37 29.845,39.37 29.845,43.18
GND on Bottom Layer "LED1_B" (solid, remove dead copper, pour order 62): 50.8,43.18 50.8,29.21 56.515,29.21 56.515,43.18
GND on Bottom Layer "LED1_G" (solid, remove dead copper, pour order 61): 46.99,43.18 46.99,29.21 51.435,29.21 51.435,43.18
GND on Bottom Layer "LED2_B" (solid, remove dead copper, pour order 59): 34.925,43.18 34.925,29.21 41.275,29.21 41.275,43.18
GND on Bottom Layer "LED2_G" (solid, remove dead copper, pour order 58): 31.115,43.18 31.115,29.21 34.925,29.21 34.925,43.18
1.7V on Bottom Layer "Bottom Layer-No Net" (solid, remove dead copper, pour order 64): 26.67,39.37 26.67,29.21 26.67,39.37
RED1_1 on Bottom Layer "Bottom Layer-RED1_1" (solid, remove dead copper, pour order 52): 38.1,29.845 38.1,19.05 43.815,19.05 43.815,21.59 45.72,21.59 45.72,24.765 43.815,24.765 43.815,29.845
GND on Bottom Layer "LED3_G" (solid, remove dead copper, pour order 63): 14.605,42.545 14.605,31.115 20.955,31.115 20.955,42.545
GND on Top Layer "TOP_GND" (hatched 45Degree grid 1.016 track 0.508, remove dead copper, pour order 68): 0,0 0,53.34 96.52,53.34 99.06,50.8 99.06,40.64 101.6,38.1 101.6,3.81 99.06,1.27 99.06,0

## Other copper
Top Layer:
  text ".PCB_Nr" at 2.286,37.084 h1.52 r90

## Silkscreen, mask and mechanical layers (free items; w line width, h text height)
Mechanical 1:
  drawing of 648 lines, arcs and shapes, not listed
PcbOutline:
  lines w0.254: 0,0 0,53.34 96.52,53.34 99.06,50.8 99.06,40.64 101.6,38.1 101.6,3.81 99.06,1.27 99.06,0 0,0
Mechanical 16:
  drawing of 4360 lines, arcs and shapes, not listed
  text "A" at 134.493,80.747 h1.78 r90
  text "D" at -9.017,79.477 h1.78 r270
  text "C" at 38.608,79.477 h1.78 r270
  text "B" at 84.328,79.477 h1.78 r270
  text "2" at -30.607,45.822 h1.78 r90
  text "2" at 157.353,45.822 h1.78 r90
  text "1" at -30.607,-26.568 h1.78 r90
  text "1" at 157.353,-26.568 h1.78 r90
  text "ENGINEER:" at 40.894,-30.201 h1.14
  text "TITLE:" at 78.994,-30.201 h1.14
  text ".ProjectName" at 86.233,-36.805 h2.5
  text "PCB DESIGNER:" at 40.894,-37.694 h1.14
  text "DATE:" at 40.894,-45.441 h1.14
  text "PART NO.:" at 78.994,-45.441 h1.14
  text "REV:" at 132.334,-45.441 h1.14
  text ".PRINT_DATE" at 42.164,-48.489 h1.78
  text ".RevisionNR" at 133.299,-49.886 h2.5
  text "FILE NAME:" at 40.894,-53.061 h1.14
  text "DWG NO:" at 78.994,-53.061 h1.14
  text "SCALE:" at 132.334,-53.061 h1.14
  text ".PCB_FILE_NAME_NO_PATH" at 42.164,-56.109 h1.78
  text ".PCB_Nr" at 86.868,-56.413 h2.5
  text "D" at -12.014,-61.341 h1.78 r270
  text "C" at 35.992,-61.341 h1.78 r270
  text "B" at 84.506,-61.341 h1.78 r270
  text "A" at 134.493,-61.493 h1.78 r90
Drill Drawing:
  text ".Legend" at 107.061,-0.127 h1.52
Mechanical 17:
  drawing of 4360 lines, arcs and shapes, not listed
  text "A" at -9.525,80.747 h1.78 r270
  text "B" at 40.64,79.477 h1.78 r90
  text "C" at 86.36,79.477 h1.78 r90
  text "D" at 133.985,79.477 h1.78 r90
  text "2" at -32.385,45.822 h1.78 r270
  text "2" at 155.575,45.822 h1.78 r270
  text "1" at -32.385,-26.568 h1.78 r270
  text "1" at 155.575,-26.568 h1.78 r270
  text "TITLE:" at 45.974,-30.201 h1.14
  text "ENGINEER:" at 84.074,-30.201 h1.14
  text ".ProjectName" at 38.735,-36.805 h2.5
  text "PCB DESIGNER:" at 84.074,-37.694 h1.14
  text "REV:" at -7.366,-45.441 h1.14
  text "PART NO.:" at 45.974,-45.441 h1.14
  text "DATE:" at 84.074,-45.441 h1.14
  text ".PRINT_DATE" at 82.804,-48.489 h1.78
  text ".RevisionNR" at -8.331,-49.886 h2.5
  text "SCALE:" at -7.366,-53.061 h1.14
  text "DWG NO:" at 45.974,-53.061 h1.14
  text "FILE NAME:" at 84.074,-53.061 h1.14
  text ".PCB_FILE_NAME_NO_PATH" at 82.804,-56.109 h1.78
  text ".PCB_Nr" at 38.1,-56.413 h2.5
  text "B" at 40.462,-61.341 h1.78 r90
  text "C" at 88.976,-61.341 h1.78 r90
  text "D" at 136.982,-61.341 h1.78 r90
  text "A" at -9.525,-61.493 h1.78 r270

## Dimensions
-0.127,53.467 to 0,0 on Measures
0,53.34 to 101.6,38.1 on Measures